# Altium PCB AerO2.PcbDoc
Units mm, origin at the board's own origin, x right, y up, seen from the top; angles counter-clockwise.
Board outline 152.4 x 101.6 mm, 2 copper layers (Top Layer, Bottom Layer); 21 components, 16 nets, 78 pads, 4 vias.
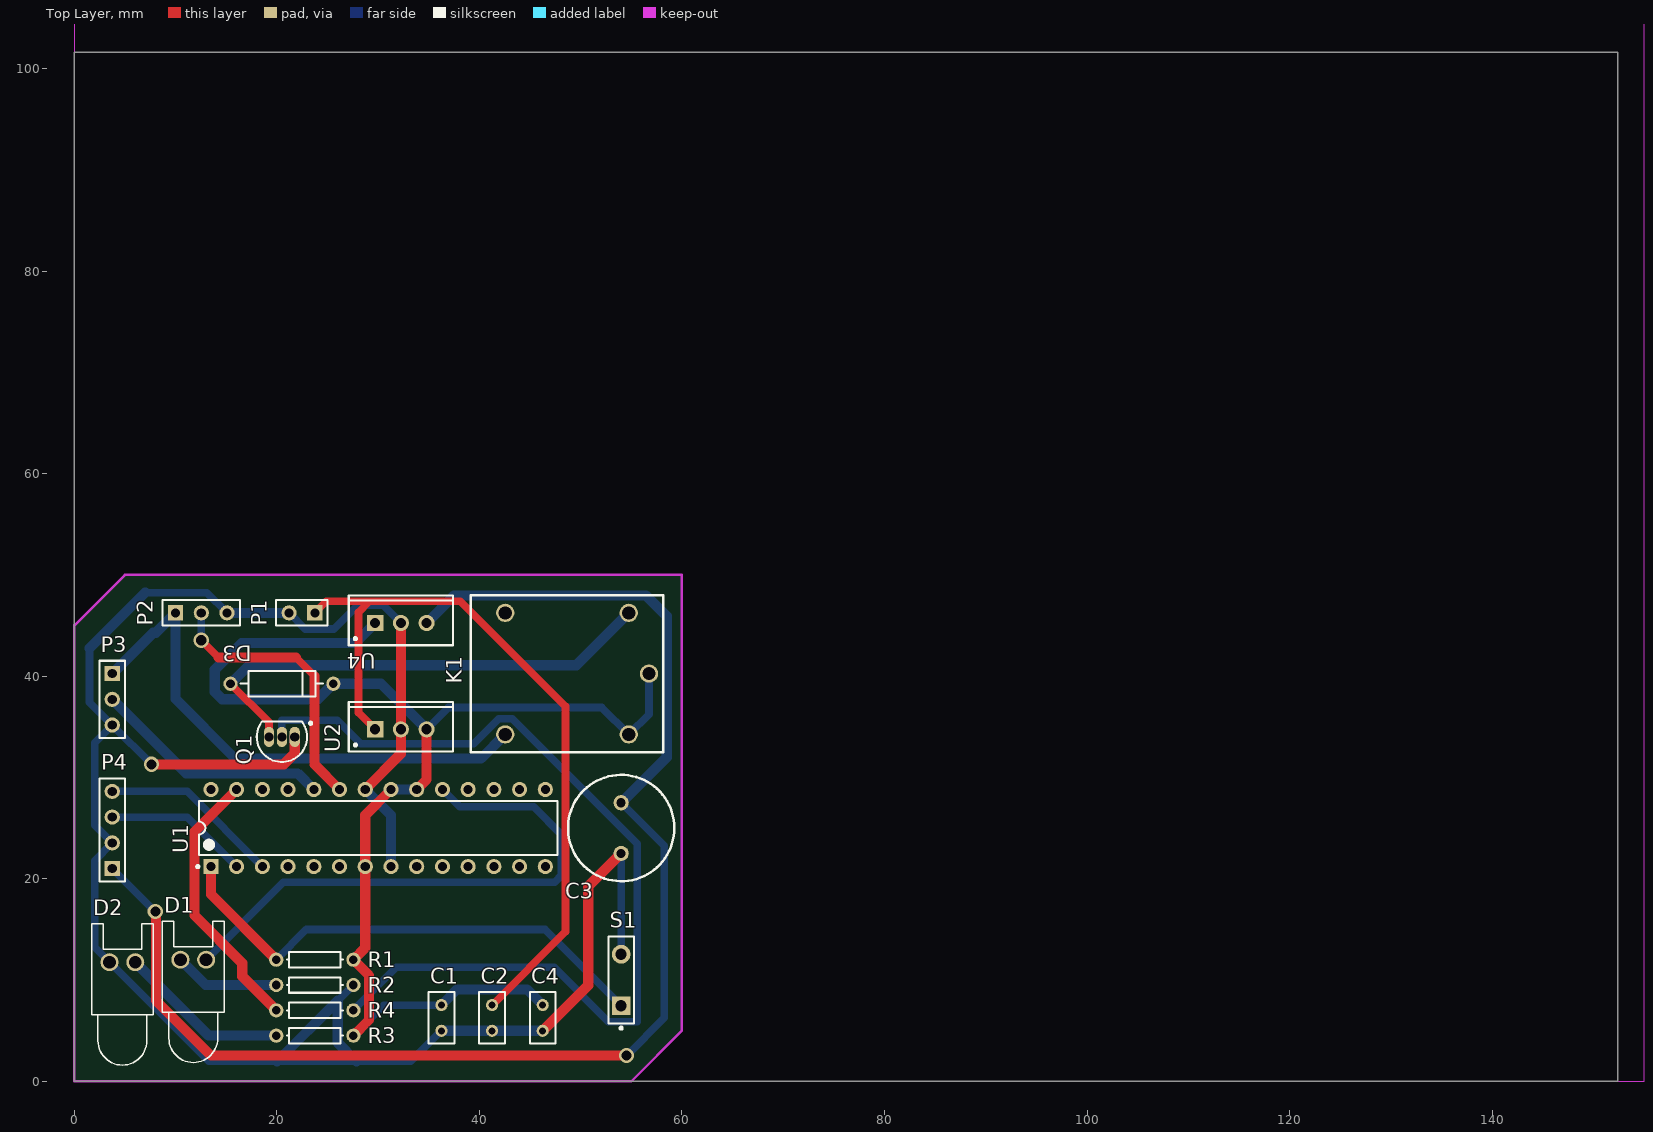
[diagram p0: Top Layer view]
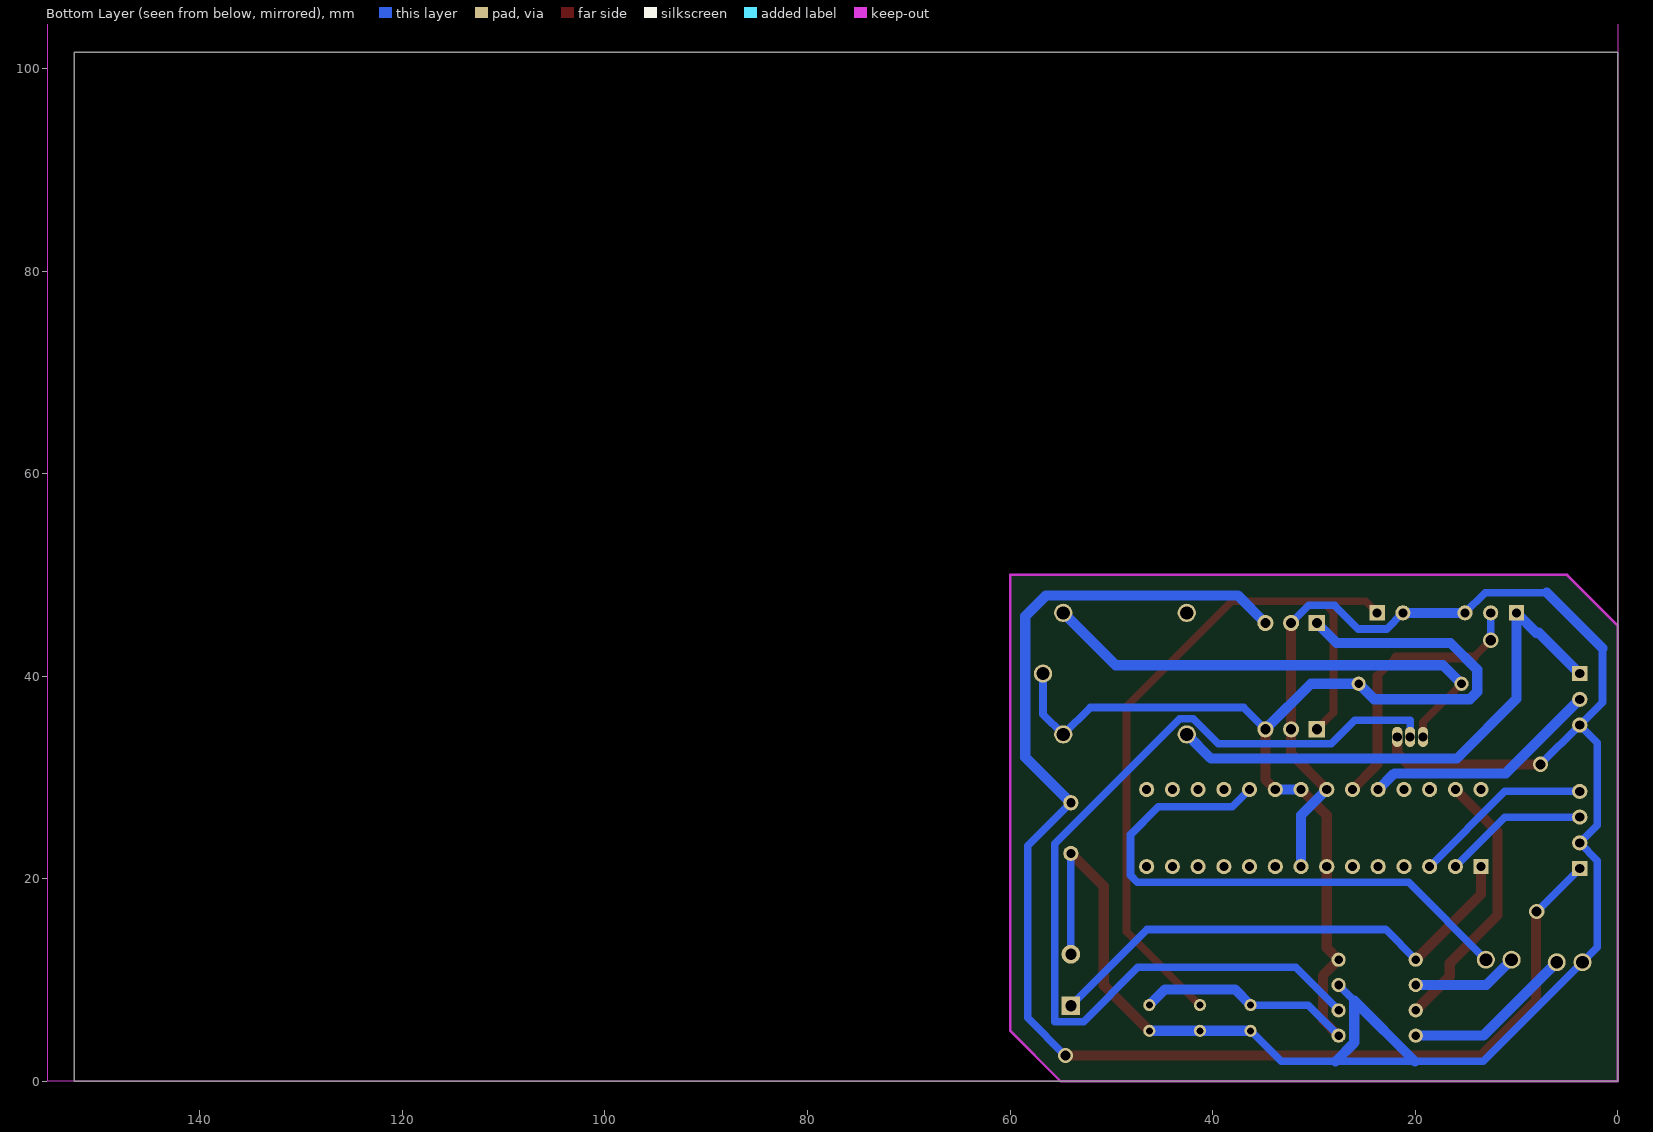
[diagram p1: Bottom Layer view, seen from below]

## Layer stack, top to bottom
Top Solder: solder mask 0.0102, Solder Resist, Dk 3.5
Top Layer: signal copper 0.0356
Dielectric 1: dielectric 0.32, FR-4, Dk 4.8
Bottom Layer: signal copper 0.0356
Bottom Solder: solder mask 0.0102, Solder Resist, Dk 3.5

## Board outline
0,0 152.4,0 152.4,101.6 0,101.6
cut-out: 0,45 5,50 60,50 60,5 55,0 155,0 155,105 0,105

## Design rules (kind name [scope] priority, off if disabled: settings)
Clearance [All] p1: gap=0.25 except(0: Arc-Text Track-Text SMDPad-Text THPad-Text Via-Text Fill-Text Poly-Text Region-Text Text-Text)
PolygonConnect [All] p1: connectstyle=Relief reliefconductorwidth=0.254 reliefentries=4 polygonreliefangle="90 Angle" airgapwidth=0.254
RoutingPriority [OnLayer('Bottom Layer')] p1: routingpriority=0
RoutingVias [All] p1: holewidth=1 width=1.5 viastyle="Through Hole" minholewidth=1 minwidth=1.5 maxholewidth=1 maxwidth=1.5
SolderMaskExpansion [All] p1: expansion=0.102
Width [All] p1: maxlimit=1 minlimit=0.75 preferedwidth=1
29 further rules are at their usual default settings.

## Components (designator, comment, footprint, x,y, rotation, side; value= is the part's Value field where it differs from the comment)
C1 "Cap" RAD-0.1 36.25,6.25 r270 top
C2 "Cap" RAD-0.1 41.25,6.25 r270 top
C3 "Cap Pol1" RB5-10.5 54,25 r270 top
C4 "Cap" RAD-0.1 46.25,6.25 r90 top
D1 "LED_Red" LED-0 11.75,12 r0 top
D2 "LED_Green" LED-0 4.75,11.75 r0 top
D3 "Diode" DIODE-0.4 20.5,39.25 r0 top
K1 "Relay HRS4(H)" "Relay HRS4(H)" 56.75,46.25 r180 top
P1 "Power" HDR1X2 23.75,46.25 r180 top
P2 "MQ5" HDR1X3 10,46.25 r0 top
P3 "MQ9" HDR1X3 3.75,40.25 r270 top
P4 "BT" HDR1X4 3.75,21 r90 top
Q1 "2N3904" TO-92A 20.5,34 r90 top
R1 "Res1" AXIAL-0.3 23.75,12 r0 top
R2 "Res1" AXIAL-0.3 23.75,9.5 r0 top
R3 "Res1" AXIAL-0.3 23.75,4.5 r0 top
R4 "Res1" AXIAL-0.3 23.75,7 r0 top
S1 "SW-PB" SPST-2 54,10 r90 top
U1 "ATmega328P-PU" 28P3 30,25 r90 top
U2 "LM7805" TO-262-AA 32.25,34.75 r0 top
U4 "LM3940" TO-262-AA 32.25,45.25 r0 top

## Footprints (in the part's own frame and the unit in brackets; to place one, negate y for a bottom-side part, rotate by r counter-clockwise, add the part's x,y. Pads: shape width x height; smd on the part's side, far side on the other; paste and mask are expansions set on the pad)
28P3 [mm] "DIP, 28-Leads, Row Spacing 7.62mm, Pitch 2.54mm, Body 34.67x7.3mm"
  rect 1.5x1.5 hole 0.9: 1(-3.81,16.51)
  round 1.5 hole 0.9: 2(-3.81,13.97) 3(-3.81,11.43) 4(-3.81,8.89) 5(-3.81,6.35) 6(-3.81,3.81) 7(-3.81,1.27) 8(-3.81,-1.27) 9(-3.81,-3.81) 10(-3.81,-6.35) 11(-3.81,-8.89) 12(-3.81,-11.43) 13(-3.81,-13.97) 14(-3.81,-16.51) 15(3.81,-16.51) 16(3.81,-13.97) 17(3.81,-11.43) 18(3.81,-8.89) 19(3.81,-6.35) 20(3.81,-3.81) 21(3.81,-1.27) 22(3.81,1.27) 23(3.81,3.81) 24(3.81,6.35) 25(3.81,8.89) 26(3.81,11.43) 27(3.81,13.97) 28(3.81,16.51)
  silkscreen extent -3.93,-17.7 2.65,17.93, body extent -3.6,-17.65 3.6,17.65, height 4.58
AXIAL-0.3 [mm] "Axial Device, Thru-Hole; 2 Leads; 0.3 in Pin Spacing"
  round 1.4 hole 0.85: 1(-3.81,0) 2(3.81,0)
  silkscreen extent -2.77,-0.76 2.77,0.76
DIODE-0.4 [mm] "Diode, Thru-Hole; 2 Leads; 0.4 in Pin Spacing"
  round 1.4 hole 0.85: 1(-5.08,0) 2(5.08,0)
  silkscreen extent -4.06,-1.27 4.06,1.27
HDR1X2 [mm] "Connector; Header; 2 Position"
  rect 1.5x1.5 hole 0.9: 1(0,0)
  round 1.5 hole 0.9: 2(2.54,0)
  silkscreen extent -1.27,-1.27 3.81,1.27
HDR1X3 [mm] "Connector; Header; 3 Position"
  rect 1.5x1.5 hole 0.9: 1(0,0)
  round 1.5 hole 0.9: 2(2.54,0) 3(5.08,0)
  silkscreen extent -1.27,-1.27 6.35,1.27
HDR1X4 [mm] "Connector; Header; 4 Position"
  rect 1.5x1.5 hole 0.9: 1(0,0)
  round 1.5 hole 0.9: 2(2.54,0) 3(5.08,0) 4(7.62,0)
  silkscreen extent -1.27,-1.27 8.89,1.27
LED-0 [mil] "LED; 2 Leads"
  round 70 hole 50: 1(50,0) 2(-50,0)
  silkscreen extent -120,-400 120,150
RAD-0.1 [mm] "Radial Cap, Thru-Hole; 2 Leads; 0.1 in Pin Spacing"
  round 1.2 hole 0.7: 1(-1.27,0) 2(1.27,0)
  silkscreen extent -2.54,-1.27 2.54,1.27
RB5-10.5 [mm] "Capacitor (Radial); 2 Leads"
  round 1.5 hole 0.9: 1(-2.5,0) 2(2.5,0)
  silkscreen extent -5.25,-5.25 5.25,5.25
"Relay HRS4(H)" [mm]
  round 1.8 hole 1.3: 1(0,6) 2(2,0) 3(14.2,0) 4(14.2,12) 5(2,12)
  silkscreen extent -1.4,-1.75 17.6,13.75, body extent -1.4,-1.75 17.6,13.75, height 16
SPST-2 [mm] "Switch; 2 Leads"
  rect 1.85x1.85 hole 1.1: 1(-2.54,0)
  round 1.85 hole 1.1: 2(2.54,0)
  silkscreen extent -4.89,-1.27 4.28,1.27
TO-92A [mm] "TO, Flat Index; 3 In-Line, Axial Leads; Body Dia. 4.5mm; Leads 0.51 x 0.48 mm (max)"
  oval 2x1 hole 0.9: 1(0,-1.27) 2(0,0) 3(0,1.27)
  silkscreen extent -2.48,-2.96 1.5,2.48, body extent -2.48,-2.5 1.5,2.5, height 6.86
TO-262-AA [mm] "TO, Thru-Hole, Vertical, Heatsink Mounted; 3 In-Line Leads; Pitch 2.54 mm"
  rect 1.6x1.6 hole 1: 1(-2.54,0)
  round 1.6 hole 1: 2(0,0) 3(2.54,0)
  silkscreen extent -5.15,-2.2 5.15,2.7, body extent -5.2,-2.25 5.2,2.75, height 19.7

## Part data
C1 C2 C4: "Capacitor"
C3: "Polarized Capacitor (Radial)"
D1 D2: library part LED0, "Typical INFRARED GaAs LED"
D3: "Default Diode"
P1: library part "Header 2", "Header, 2-Pin"
P2 P3: library part "Header 3", "Header, 3-Pin"
P4: library part "Header 4", "Header, 4-Pin"
Q1: "NPN General Purpose Amplifier"
R1 R2 R3 R4: "Resistor"
S1: "Switch"
U1: "8-bit AVR Microcontroller, 32KB Flash, 1KB EEPROM, 2KB SRAM, 28-pin PDIP, Industrial Grade (-40°C to 85°C)"
U2 U4: library part µA78M05CKC, "Positive-Voltage Regulator"

## Via types
v1: diameter 1.5, hole 1, Top Layer to Bottom Layer, 4 vias

## Nets (pads, with @x,y where several pads share a name; then routed paths per layer and width w, separated by ;. In a path a pad name is that pad's centre, name@x,y a point inside that pad or via, vN(x,y) a via of type N, cw(c..) or ccw(c..) an arc to the next point about the centre after c; other vN are vias at no path point)
+9VDC: C2.1 P1.1 U2.1 | length 75.8
  Top Layer w0.75: P1.1 24.896,47.396 38.125,47.396 48.5,37.022 48.5,14.77 C2.1 ; 29.146,47.396 28.067,46.317 28.067,36.393 U2.1
GND: C1.2 C2.2 C3.2 C4.1 D2.2 P1.2 P2.3 P3.3 P4.2 Q1.1 R2.2 S1.2 U1.8 U1.22 U2.2 U4.2 | length 215.4
  Top Layer w1: v1(7.627,31.293) 20.678,31.293 21.77,32.385 Q1.1 ; U1.22 32.25,32.33 U2.2 U4.2 ; C4.1 50.75,9.48 50.75,19.25 C3.2
  Bottom Layer w0.75: 1.5,42.75 1.5,37.42 P3.3 ; 7,48.25 13.08,48.25 P2.3 ; v1(7.627,31.293) P3.3 ; P1.2 22.807,44.653 25.629,44.653 27.965,46.99 30.51,46.99 U4.2 ; 26.01,7.95 R2.2 ; C1.2 33.226,1.956 27.864,1.956 20.016,1.956 13.274,1.956 D2.2 2,13.23 2,21.79 P4.2 2,25.29 2,33.42 P3.3 ; S1.2 C3.2
  Bottom Layer w1: 1.5,42.75 7,48.25 ; P2.3 P1.2 ; 20.016,1.956 26.01,7.95 26.01,3.81 27.864,1.956 ; U1.22 31.27,26.27 U1.8 ; C1.2 C2.2 C4.1
NetC3_1: C3.1 P4.1 U4.3 | length 137.8
  Top Layer w1: v1(8,16.75) 8.052,16.698 8.052,7.976 13.487,2.54 v1(54.54,2.54)
  Bottom Layer w0.75: P4.1 v1(8,16.75) ; C3.1 58.25,23.25 58.25,6.25 v1(54.54,2.54)
  Bottom Layer w1: U4.3 37.521,47.981 56.439,47.981 58.496,45.923 58.496,31.996 C3.1
NetD1_1: D1.1 U1.19 | length 56.2
  Bottom Layer w0.75: D1.1 20.654,19.634 47.422,19.634 48.108,20.32 48.108,24.359 45.364,27.102 38.058,27.102 U1.19
NetD1_2: D1.2 R2.1 | length 10.5
  Bottom Layer w1: D1.2 12.98,9.5 R2.1
NetD2_1: D2.1 R3.1 | length 16.9
  Bottom Layer w1: D2.1 13.27,4.5 R3.1
NetD3_1: D3.1 K1.2 Q1.3 | length 49.1
  Top Layer w0.75: D3.1 19.23,35.44 Q1.3
  Bottom Layer w1: D3.1 17.242,41.072 49.572,41.072 K1.2
NetQ1_2: Q1.2 R4.2 | length 93.4
  Bottom Layer w0.75: Q1.2 20.5,35.662 25.959,35.662 28.296,33.325 39.446,33.325 41.896,35.775 43.244,35.775 55.575,23.444 55.575,5.893 52.73,5.893 47.371,11.252 31.812,11.252 R4.2
NetR1_1: R1.1 S1.1 U1.1 | length 50.3
  Top Layer w1: U1.1 13.49,18.45 R1.1
  Bottom Layer w0.75: R1.1 22.926,14.986 46.474,14.986 S1.1
"PC0 (ADC0 / PCINT8)": P2.2 U1.23 | length 27.6
  Top Layer w0.75: v1(12.54,43.54) 14.25,41.83 ; 21.899,41.83 23.733,39.996
  Top Layer w1: 14.25,41.83 21.899,41.83 ; 23.733,39.996 23.733,31.267 U1.23
  Bottom Layer w0.75: v1(12.54,43.54) P2.2
"PC1 (ADC1 / PCINT9)": P3.2 U1.24 | length 23.6
  Bottom Layer w1: P3.2 11.056,30.404 22.056,30.404 U1.24
"PC4 (ADC4/ SDA/ PCINT12)": R4.1 U1.27 | length 26.9
  Top Layer w1: U1.27 11.887,24.667 11.887,16.358 16.586,11.659 16.586,10.354 R4.1
"PD0 (PCINT16 / RXD)": P4.3 U1.2 | length 14.3
  Bottom Layer w0.75: P4.3 11.14,26.08 U1.2
"PD1 (PCINTI7 / TXD)": P4.4 U1.3 | length 17.9
  Bottom Layer w0.75: P4.4 11.14,28.62 U1.3
POWER_MQ: K1.4 P2.1 P3.1 | length 53.2
  Bottom Layer w1: P3.1 7.79,44.29 8.04,44.29 P2.1 10,37.754 15.877,31.877 40.177,31.877 K1.4
VCC5V: C1.1 C4.2 D3.2 K1.1 K1.5 R1.2 R3.2 U1.7 U1.20 U1.21 U2.3 U4.1 | length 129.7
  Top Layer w1: R3.2 29.108,6.048 29.108,10.452 R1.2 28.73,13.17 U1.7 28.73,26.27 U1.21 ; U1.20 34.79,29.79 U2.3
  Bottom Layer w0.75: R3.2 30.58,7.52 C1.1 ; U2.3 36.94,36.9 52.1,36.9 K1.5 56.75,36.25 K1.1
  Bottom Layer w1: U4.1 27.742,43.282 16.51,43.282 13.868,40.64 13.868,38.456 14.605,37.719 24.049,37.719 D3.2 30.29,39.25 U2.3 ; U1.21 U1.20 ; C1.1 37.798,9.068 44.702,9.068 C4.2
pads on no net: K1.3 U1.4 U1.5 U1.6 U1.9 U1.10 U1.11 U1.12 U1.13 U1.14 U1.15 U1.16 U1.17 U1.18 U1.25 U1.26 U1.28

## Keep-outs
Keep-Out Layer:
  lines w0.254: 0,0 55,0 60,5 60,50 5,50 0,45 0,0